# Altium PCB pcb.PcbDoc
Units mil, origin at the board's own origin, x right, y up, seen from the top; angles counter-clockwise.
Board outline 2246.25 x 3273.81 mil, 2 copper layers (Top Layer, Bottom Layer); 43 components, 41 nets, 176 pads, 0 vias.
Unrouted connection lines stored in the file: 31.
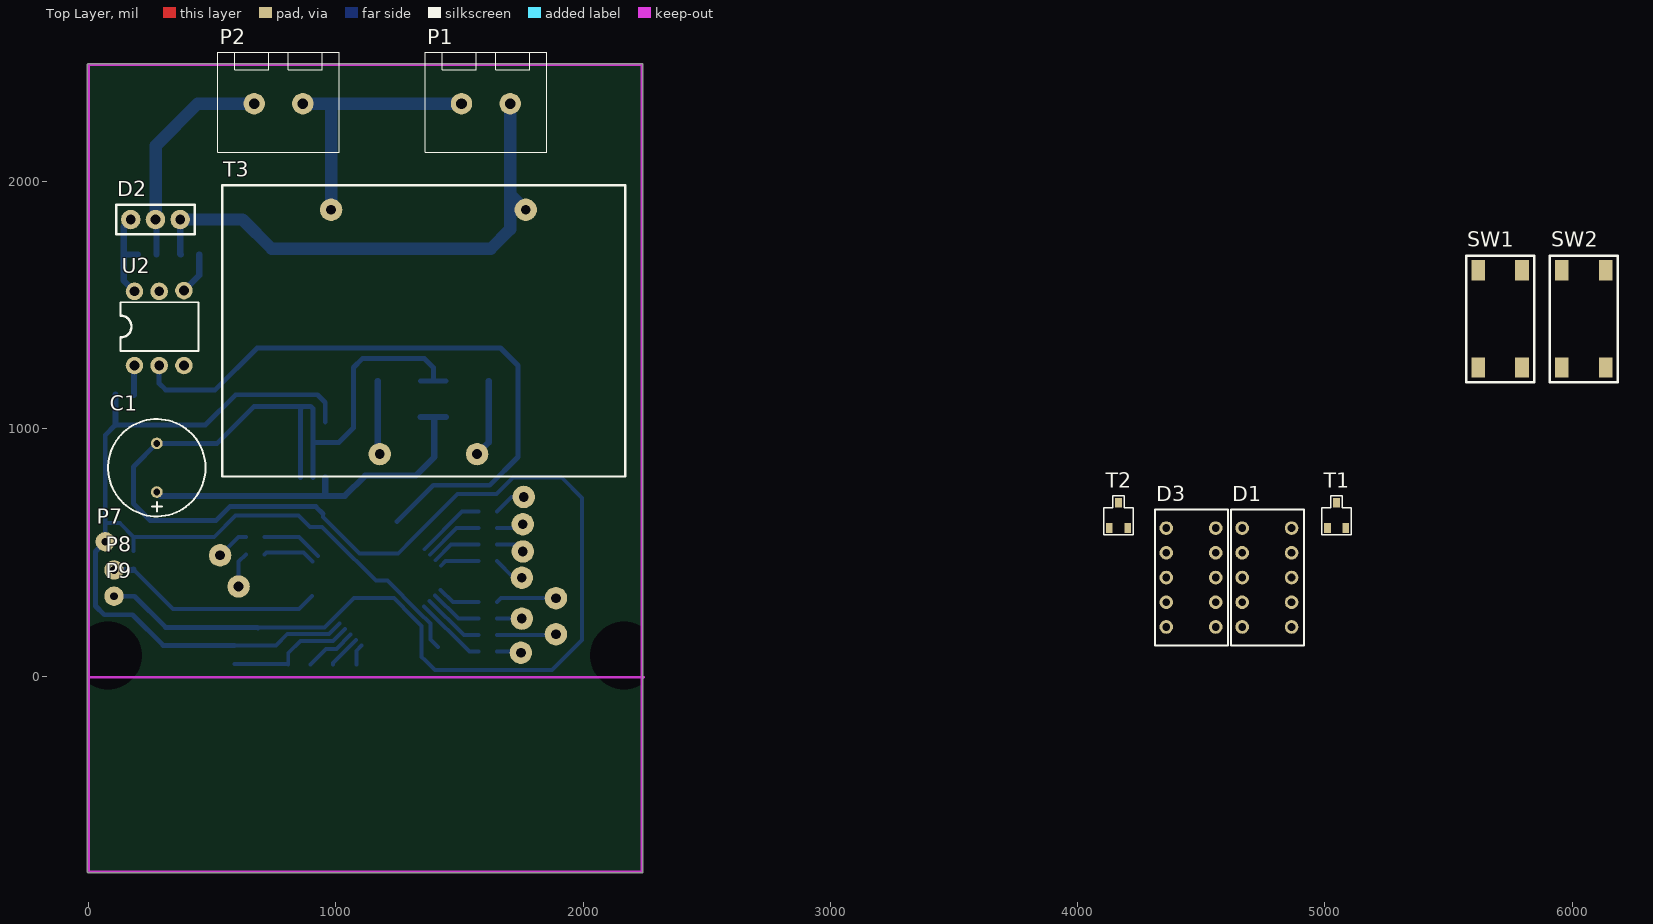
[diagram p0: Top Layer view]
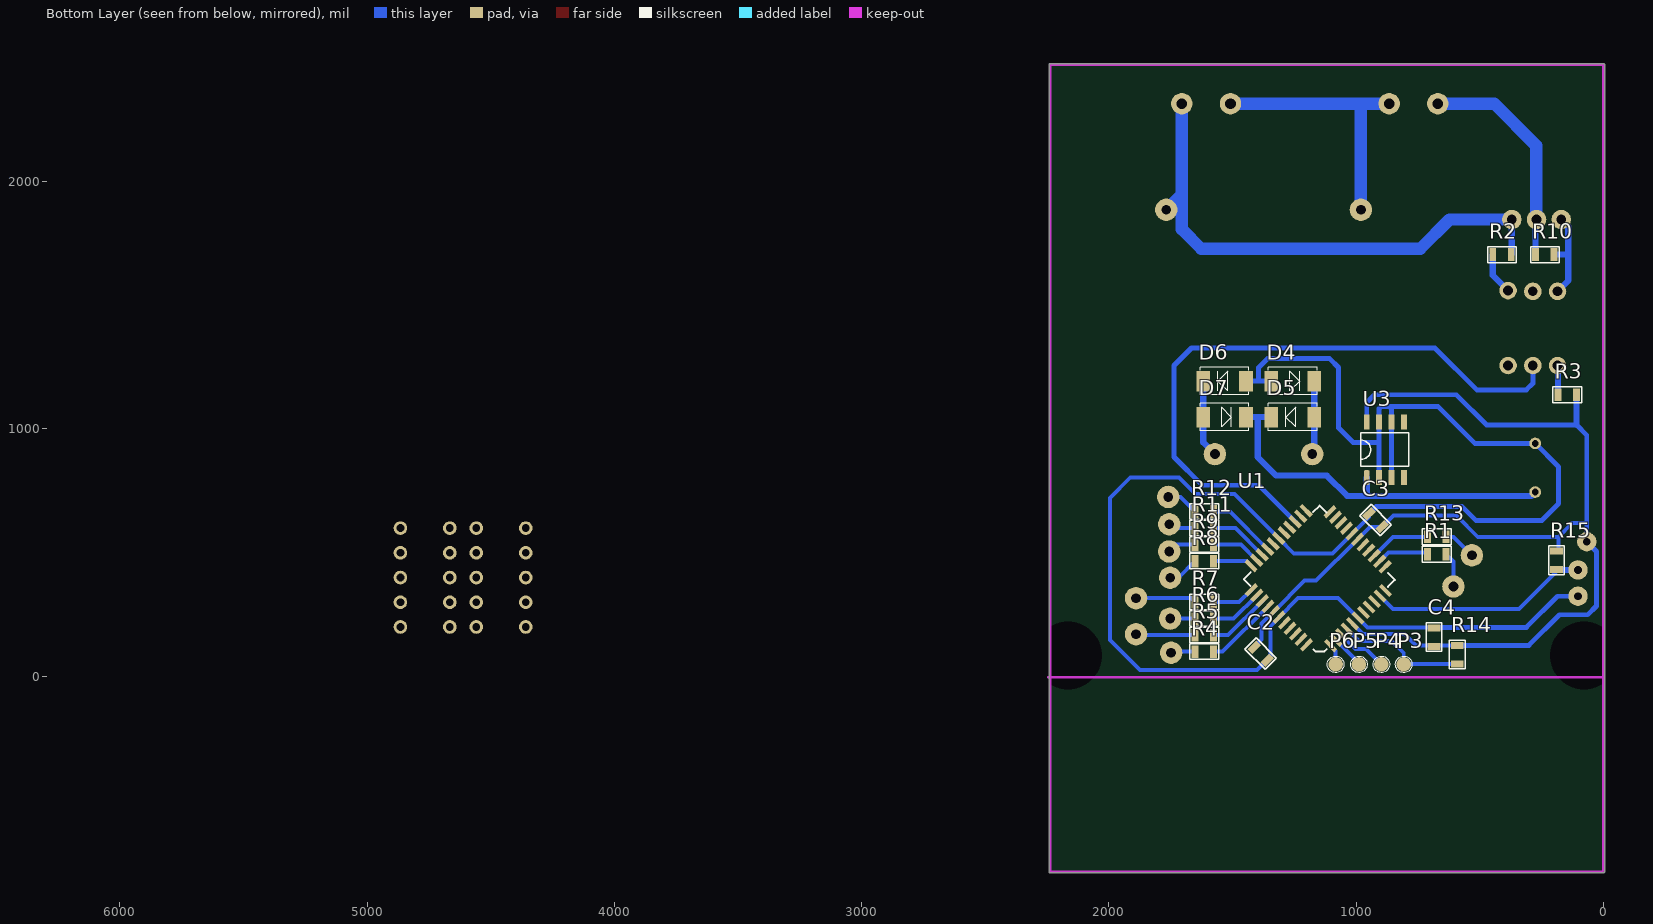
[diagram p1: Bottom Layer view, seen from below]

## Layer stack, top to bottom
Top Solder: solder mask 0.4, Solder Resist, Dk 3.5
Top Layer: signal copper 1.4
Dielectric 1: dielectric 12.6, FR-4, Dk 4.8
Bottom Layer: signal copper 1.4
Bottom Solder: solder mask 0.4, Solder Resist, Dk 3.5

## Board outline
-5.01,-791.34 ccw(c0,-791.34) 0,-796.35 2236.22,-796.35 ccw(c2236.22,-791.34) 2241.24,-791.34 2241.24,2472.44 ccw(c2236.22,2472.44) 2236.22,2477.46 0,2477.46 ccw(c0,2472.44) -5.01,2472.44

## Design rules (kind name [scope] priority, off if disabled: settings)
Clearance [All] p1: gap=10
PolygonConnect [All] p1: connectstyle=Relief reliefconductorwidth=10 reliefentries=4 polygonreliefangle="90 Angle" airgapwidth=10
RoomDefinition schemat [InComponentClass('schemat')] p1: confinementstyle=ConfineIn formatcopy=TRUE lockcomponents=FALSE outline -547.24,-1129.92 3318.9,-1129.92 3318.9,3515.75 -547.24,3515.75
RoutingVias [All] p1: holewidth=28 width=50 viastyle="Through Hole" minholewidth=28 minwidth=50 maxholewidth=28 maxwidth=50
SolderMaskExpansion [All] p1: expansion=4
Width [All] p1: maxlimit=50 minlimit=10 preferedwidth=16
30 further rules are at their usual default settings.

## Components (designator, comment, footprint, x,y, rotation, side; value= is the part's Value field where it differs from the comment)
C1 "CPOL" Cap10/5mm 275.59,940.94 r270 top
C2 "100n" 0805C 1385.83,90.55 r225 bottom
C3 "100n" 0805C 921.26,629.92 r45 bottom
C4 "100n" 0805C 685.04,157.48 r90 bottom
D1 "LED_DISP" LED_DISP 4665.35,598.43 r0 top
D2 "BT136" TO220 370.08,1846.46 r180 top
D3 "LED_DISP" LED_DISP 4358.27,598.43 r0 top
D4 "Schottky" SOD128 1169.29,1192.91 r0 bottom
D5 "Schottky" SOD128 1342.52,1047.24 r180 bottom
D6 "Schottky" SOD128 1618.11,1192.91 r180 bottom
D7 "Schottky" SOD128 1444.88,1047.24 r0 bottom
P1 "230V_IN" ARK2 1704.72,2314.96 r270 top
P2 "230V_OUT" ARK2 866.14,2314.96 r270 top
P3 "PAD" PAD1.5 807.09,47.24 r180 bottom
P4 "PAD" PAD1.5 897.64,47.24 r180 bottom
P5 "PAD" PAD1.5 988.19,47.24 r180 bottom
P6 "PAD" PAD1.5 1082.68,47.24 r180 bottom
P7 "PAD_THT" PAD_0.8mm 66.93,937.01 r0 top
P8 "PAD_THT" PAD_0.8mm 102.36,822.83 r0 top
P9 "PAD_THT" PAD_0.8mm 102.36,716.54 r0 top
R1 "1k" 0805R 673.23,492.13 r0 bottom
R2 "330" 0805R 409.45,1704.72 r180 bottom
R3 "330" 0805R 145.67,1137.8 r180 bottom
R4 "220" 0805R 1614.17,98.43 r0 bottom
R5 "220" 0805R 1614.17,165.35 r0 bottom
R6 "220" 0805R 1614.17,232.28 r0 bottom
R7 "220" 0805R 1614.17,299.21 r0 bottom
R8 "220" 0805R 1614.17,464.57 r0 bottom
R9 "220" 0805R 1614.17,531.5 r0 bottom
R10 "330" 0805R 236.22,1704.72 r180 bottom
R11 "220" 0805R 1614.17,598.42 r0 bottom
R12 "220" 0805R 1614.17,665.35 r0 bottom
R13 "1k" 0805R 673.23,562.99 r0 bottom
R14 "4k7" 0805R 590.55,86.61 r270 bottom
R15 "4k7" 0805R 188.98,468.5 r270 bottom
SW1 "SW 5mm 1,5N SMD" SW5SMD 5708.65,1444.88 r90 top
SW2 "SW 5mm 1,5N SMD" SW5SMD 6047.23,1444.88 r90 top
T1 "BC857C" SOT23-3 5047.24,649.61 r180 top
T2 "BC857C" SOT23-3 4165.35,649.61 r180 top
T3 "Transformer" TSZZ4.5/017M 980.32,1885.83 r0 top locked
U1 "ATMEGA16" TQFP44 1106.3,125.98 r45 bottom
U2 "MOC3020" DIP6 185.04,1255.91 r90 top
U3 "78L05" SOIC8 956.69,803.15 r90 bottom

## Footprints (in the part's own frame and the unit in brackets; to place one, negate y for a bottom-side part, rotate by r counter-clockwise, add the part's x,y. Pads: shape width x height; smd on the part's side, far side on the other; paste and mask are expansions set on the pad)
0805C [mm]
  rect 0.7x1.3 smd: 1(-0.95,0) 2(0.95,0)
  silkscreen extent -1.48,-0.82 1.48,0.8, body extent -1,-0.62 1,0.63, height 0.78
0805R [mm]
  rect 0.7x1.3 smd: 1(-0.95,0) 2(0.95,0)
  silkscreen extent -1.48,-0.82 1.48,0.8, body extent -1,-0.62 1,0.63, height 0.78
ARK2 [mm] "5mm pitch"
  round 2.2 hole 1.1 paste+0.01 mask+0.01: 1(0,0) 2(0,-5)
  silkscreen extent -5.3,-8.75 5,3.75, body extent -4,-7.5 3.5,2.5, height 11.4
Cap10/5mm [mm]
  round 1.2 hole 0.7: 1(0,0) 2(5,0)
  silkscreen extent -2.5,-5 7.5,5, body extent -2.5,-5 7.5,5, height 25
DIP6 [mm]
  round 1.8 hole 1: 1(0,0) 1(0,0) 2(0,-2.54) 3(0,-5.08) 4(7.7,-5.08) 5(7.62,-2.54) 6(7.62,0)
  silkscreen extent 1.5,-6.58 6.5,1.42
LED_DISP [mm]
  round 1.4 hole 0.8: 1(0,0) 2(0,-2.54) 3(0,-5.08) 4(0,-7.62) 5(0,-10.16) 6(5.08,-10.16) 7(5.08,-7.62) 8(5.08,-5.08) 9(5.08,-2.54) 10(5.08,0)
  silkscreen extent -1.17,-12.08 6.33,1.92
PAD1.5 [mm] "d=1.5mm"
  round 1.5 smd: 1(0,0)
  silkscreen extent -0.85,-0.85 0.85,0.85
PAD_0.8mm [mm]
  round 2 hole 0.8: 1(0,-10)
SOD128 [mm]
  rect 1.4x2.1 smd paste+0.01 mask+0.01: 1(0,0) 2(4.4,0)
  silkscreen extent -0.3,-1.4 4.7,1.4, body extent -0.3,-1.31 4.7,1.39, height 1.1
SOIC8 [mm]
  rrect50% 1.5x0.6 smd: 1(0,0)
  rect 1.5x0.6 smd: 2(0,-1.27) 3(0,-2.54) 4(0,-3.81) 5(5.7,-3.81) 6(5.7,-2.54) 7(5.7,-1.27) 8(5.7,0)
  silkscreen extent 1.14,-4.32 4.57,0.6, body extent -0.16,-4.4 5.86,0.6, height 1.75
SOT23-3 [mm]
  rect 0.7x1 smd: 1(0.95,1.3) 2(-0.95,1.3) 3(0,-1.3)
  silkscreen extent -1.5,-2.02 1.5,2, body extent -1.5,-1.32 1.5,1.32, height 1.08
SW5SMD [mm]
  rect 2.1x1.4 smd: 1(-5,-2.25) 1(5,-2.25) 2(-5,2.25) 2(5,2.25)
  silkscreen extent -6.5,-3.5 6.5,3.5, body extent -3,-3 3,3, height 5
TO220 [mm]
  round 2 hole 1 paste+0.01 mask+0.01: 1(0,0) 2(2.54,0) 3(5.08,0)
  silkscreen extent -1.5,-1.5 6.58,1.5
TQFP44 [mm]
  rect 1.524x0.45 smd: 1(-0.1,0) 1(-0.1,0) 2(-0.1,-0.8) 3(-0.1,-1.6) 4(-0.1,-2.4) 5(-0.1,-3.2) 6(-0.1,-4) 7(-0.1,-4.8) 8(-0.1,-5.6) 9(-0.1,-6.4) 10(-0.1,-7.2) 11(-0.1,-8) 23(11.468,-8.031) 24(11.468,-7.231) 25(11.468,-6.431) 26(11.468,-5.631) 27(11.468,-4.831) 28(11.468,-4.031) 29(11.468,-3.231) 30(11.468,-2.431) 31(11.468,-1.631) 32(11.468,-0.831) 33(11.468,-0.031)
  rect 0.45x1.524 smd: 12(1.653,-9.688) 13(2.452,-9.688) 14(3.252,-9.688) 15(4.052,-9.688) 16(4.852,-9.688) 17(5.652,-9.688) 18(6.452,-9.688) 19(7.252,-9.688) 20(8.052,-9.688) 21(8.852,-9.688) 22(9.652,-9.688) 34(9.693,1.69) 35(8.893,1.69) 36(8.093,1.69) 37(7.293,1.69) 38(6.492,1.69) 39(5.692,1.69) 40(4.892,1.69) 41(4.092,1.69) 42(3.292,1.69) 43(2.492,1.69) 44(1.692,1.69)
  silkscreen extent -0.09,-9.45 11.03,1.52, body extent -0.3,-10 11.7,2, height 1.1
TSZZ4.5/017M [mm]
  round 2.3 hole 1: 1(0,0) 5(20,0) 7(15,-25.1) 9(5,-25.1)
  silkscreen extent -11.2,-27.4 30.2,2.5

## Part data
C2 C3 C4: library part C, "Kondensator"
P1 P2: library part ARK2, "5mm"
R1 R2 R3 R4 R5 R6 R7 R8 R9 R10 R11 R12 R13 R14 R15: library part R, "Rezystor"
SW1 SW2: "Microswitch"
T1 T2: "PNP (45V/0.1A)"

## Free pads (board coordinates)
  round 90.55 hole 39.37 unplated paste+0.39 mask+0.39: 2(1759.84,724.41) 3(1755.91,614.17) 4(1755.91,503.94) 5(1751.97,397.64) 6(1889.76,314.96) 7(1751.97,232.28) 8(1889.76,169.29) 9(1748.03,94.49) 10(531.5,488.19) 11(606.3,362.2)
  oval 0x78.74 hole 275.59 unplated mask+0.39: ""(78.74,82.68) ""(2165.35,82.68)
  round 196.85 on Bottom Overlay mask+0.39: ""(346.46,-405.51) ""(354.33,484.25) ""(354.33,2118.11) ""(1881.89,-405.51) ""(1889.76,484.25) ""(1889.76,2118.11)

## Nets (pads, with @x,y where several pads share a name; then routed paths per layer and width w, separated by ;. In a path a pad name is that pad's centre, name@x,y a point inside that pad or via, vN(x,y) a via of type N, cw(c..) or ccw(c..) an arc to the next point about the centre after c; other vN are vias at no path point)
5V: C2.1 C3.1 C4.1 P7.1 R3.2 R14.1 R15.1 T1.3 T2.3 U1.5 U1.17 U1.38 U3.8 | length 4687.5
  Bottom Layer w16: 66.93,618.11 125.98,618.11 181.1,562.99 ; R15.1@181.1,505.91 181.1,562.99 ; R14.1 757.87,124.02 803.15,169.29 971.44,169.29 U1.5 ; C2.1 1381.89,147.38 1381.89,211.85 U1.38 1207.92,385.83 1161.15,385.83 U1.17 943.5,603.47 C3.1 848.68,649.61 594.49,649.61 507.87,562.99 181.1,562.99
  Bottom Layer w20: R14.1 301.18,124.02 177.17,248.03 62.99,248.03 27.56,283.46 27.56,503.94 P7.1 66.93,618.11 66.93,974.41 108.27,1015.75 472.44,1015.75 594.49,1137.8 925.2,1137.8 956.69,1106.3 U3.8
  Bottom Layer w25: 108.27,1015.75 R3.2
230V_L: D2.1 P1.1 R2.2 T3.5 | length 2155.7
  Bottom Layer w25: D2.1 370.08,1706.69 R2.2
  Bottom Layer w50: D2.1 622.05,1846.46 740.16,1728.35 1625.98,1728.35 1704.72,1807.09 1704.72,1948.82 ; P1.1 1704.72,1948.82 ; T3.5 1704.72,1948.82
230V_N: P1.2 P2.1 T3.1 | length 1074.1
  Bottom Layer w50: P2.1 972.44,2314.96 ; T3.1 980.32,2307.09 972.44,2314.96 ; P1.2 972.44,2314.96
GND: C1.1 C2.2 C3.2 C4.2 D4.2 D6.2 P9.1 SW1.1 SW2.1 U1.6 U1.18 U1.28 U1.39 U3.2 U3.3 U3.6 U3.7 | length 7424.8
  Bottom Layer w16: C4.2 687.01,196.85 954.45,196.85 U1.6 1072.56,314.96 1234.24,314.96 U1.39 1346.46,202.74 1346.46,77.03 C2.2 1399.86,23.62 1874.02,23.62 1996.06,145.67 1996.06,720.47 1913.39,803.15 1716.54,803.15 1649.61,736.22 1492.1,736.22 U1.28 1251.94,496.06 1095.45,496.06 U1.18 947.71,643.81 C3.2
  Bottom Layer w20: P9.1@98.43,322.83 185.04,322.83 311.02,196.85 683.07,196.85 C4.2 ; U3.3 U3.6 856.69,1081.1 866.14,1090.55 ; U3.2 906.69,944.88 ; C3.2 919.04,685.04 570.87,685.04 515.75,629.92 248.03,629.92 181.1,696.85 181.1,846.46 C1.1 519.68,940.94 669.29,1090.55 866.14,1090.55 ; D4.2 1393.7,1192.91 ; D6.2 1393.7,1192.91 ; 866.14,1090.55 897.64,1090.55 906.69,1081.5 U3.7 906.69,944.88 ; 906.69,944.88 1011.81,944.88 1070.87,1003.94 1070.87,1248.03 1106.3,1283.46 1358.27,1283.46 1393.7,1248.03 1393.7,1192.91
LED_A: D1.10 D3.10 pad.9 R4.2 | length 96.7
  Bottom Layer w16: R4.2 1720.47,98.43 pad.9
LED_B: D1.9 D3.9 pad.8 R5.2 | length 239.8
  Bottom Layer w16: R5.2 1885.83,165.35 pad.8
LED_C: D1.8 D3.8 pad.7 R6.2 | length 100.4
  Bottom Layer w16: R6.2 pad.7
LED_D: D1.5 D3.5 pad.6 R7.2 | length 244.7
  Bottom Layer w16: R7.2 1667.32,314.96 pad.6
LED_DP: D3.7 pad.2 R12.2 | length 132.7
  Bottom Layer w16: R12.2 1710.63,724.41 pad.2
LED_E: D1.4 D3.4 pad.5 R8.2 | length 128.1
  Bottom Layer w16: R8.2 1718.5,397.64 pad.5
LED_F: D1.2 D3.2 pad.4 R9.2 | length 115.7
  Bottom Layer w16: R9.2 1728.35,531.5 pad.4
LED_G: D1.3 D3.3 pad.3 R11.2 | length 110.9
  Bottom Layer w16: R11.2 1740.16,598.42 pad.3
NetC1_2: C1.2 D5.1 D7.1 U3.1 | length 1535.6
  Bottom Layer w25: C1.2 291.34,728.35 948.82,728.35 ; U3.1 956.69,736.22 948.82,728.35 ; D5.1 1397.64,1047.24 ; D7.1 1397.64,1047.24 ; 948.82,728.35 1035.43,728.35 1118.11,811.02 1322.83,811.02 1397.64,885.83 1397.64,1047.24
NetD1_1: D1.1 D1.6 T1.2
NetD2_2: D2.2 P2.2 R10.1 | length 911.7
  Bottom Layer w25: D2.2 271.65,1844.88 273.62,1842.91 R10.1
  Bottom Layer w50: D2.2@271.65,1844.88 271.65,2145.67 440.94,2314.96 P2.2
NetD2_3: D2.3 R10.2 U2.6 | length 377.3
  Bottom Layer w25: D2.3 141.73,1818.11 141.73,1704.72 ; U2.6 141.73,1599.21 141.73,1704.72 ; R10.2 141.73,1704.72
NetD3_1: D3.1 D3.6 T2.2
NetD4_1: D4.1 D5.2 T3.9 | length 298.5
  Bottom Layer w25: D4.1 1169.29,905.51 T3.9
NetD6_1: D6.1 D7.2 T3.7 | length 314.8
  Bottom Layer w25: T3.7 1618.11,944.88 D7.2 D6.1
NetP3_1: P3.1 R14.2 U1.4 | length 532.6
  Bottom Layer w16: R14.2 805.12,49.21 P3.1 807.09,92.52 856.3,141.73 988.42,141.73 U1.4
NetP4_1: P4.1 U1.3 | length 211.2
  Bottom Layer w16: P4.1 960.63,110.24 1001.47,110.24 U1.3
NetP5_1: P5.1 U1.2 | length 136.8
  Bottom Layer w16: P5.1 988.19,52.42 U1.2
NetP6_1: P6.1 U1.1 | length 84.6
  Bottom Layer w16: P6.1 1082.68,102.36 U1.1@1103.52,123.2
NetP8_1: P8.1 R15.2 U1.10 | length 889.1
  Bottom Layer w16: R15.2@181.1,431.1 340.55,271.65 851.09,271.65 U1.10
  Bottom Layer w25: P8.1 179.13,429.13 R15.2@181.1,431.1
NetR1_1: pad.11 R1.1 T1.1 | length 142.2
  Bottom Layer w16: pad.11 606.3,462.6 R1.1
NetR1_2: R1.2 U1.13 | length 212.4
  Bottom Layer w16: R1.2 718.5,500 868.81,500 U1.13
NetR2_1: R2.1 U2.4 | length 171.3
  Bottom Layer w25: U2.4 446.85,1620.87 R2.1
NetR3_1: R3.1 U2.1 | length 118.9
  Bottom Layer w25: R3.1 183.07,1253.94 U2.1@185.04,1255.91
NetR4_1: R4.1 U1.37 | length 296.4
  Bottom Layer w16: U1.37 1539.94,98.43 R4.1
NetR5_1: R5.1 U1.36 | length 255.6
  Bottom Layer w16: U1.36 1517.55,165.35 R5.1
NetR6_1: R6.1 U1.35 | length 214.9
  Bottom Layer w16: U1.35 1495.16,232.28 R6.1
NetR7_1: R7.1 U1.34 | length 174.1
  Bottom Layer w16: U1.34 1472.78,299.21 R7.1
NetR8_1: R8.1 U1.33 | length 159.7
  Bottom Layer w16: U1.33 1443.16,464.57 R8.1
NetR9_1: R9.1 U1.32 | length 200.5
  Bottom Layer w16: U1.32 1465.54,531.5 R9.1
NetR11_1: R11.1 U1.31 | length 241.3
  Bottom Layer w16: U1.31 1487.93,598.42 R11.1
NetR12_1: R12.1 U1.30 | length 282
  Bottom Layer w16: U1.30 1510.32,665.35 R12.1
NetR13_1: pad.10 R13.1 T2.1 | length 135.3
  Bottom Layer w16: pad.10 606.3,562.99 R13.1
NetR13_2: R13.2 U1.14 | length 248.3
  Bottom Layer w16: R13.2 850.36,562.99 U1.14
NetSW1_2: SW1.2 U1.11
NetSW2_2: SW2.2 U1.12
NetU1_25: U1.25 U2.2 | length 2602
  Bottom Layer w20: U2.2 285.04,1183.46 311.02,1157.48 511.81,1157.48 681.1,1326.77 1665.35,1326.77 1736.22,1255.91 1736.22,885.83 1622.05,771.65 1393.91,771.65 U1.25
pads on no net: D1.7 U1.7 U1.8 U1.9 U1.15 U1.16 U1.19 U1.20 U1.21 U1.22 U1.23 U1.24 U1.26 U1.27 U1.29 U1.40 U1.41 U1.42 U1.43 U1.44 U2.3 U2.5 U3.4 U3.5

## Keep-outs
Keep-Out Layer:
  lines w10: 7.87,-3.94 2244.09,-3.94 ; 0,-791.34 0,2472.44 2236.22,2472.44 2236.22,-791.34 0,-791.34